# Altium PCB nrf52840_bma250e.PcbDoc
Units mil, origin at the board's own origin, x right, y up, seen from the top; angles counter-clockwise.
Board outline 1377.95 x 2936.39 mil, 2 copper layers (Top Layer, Bottom Layer), stack 12.8 mil thick; 55 components, 72 nets, 214 pads, 168 vias.
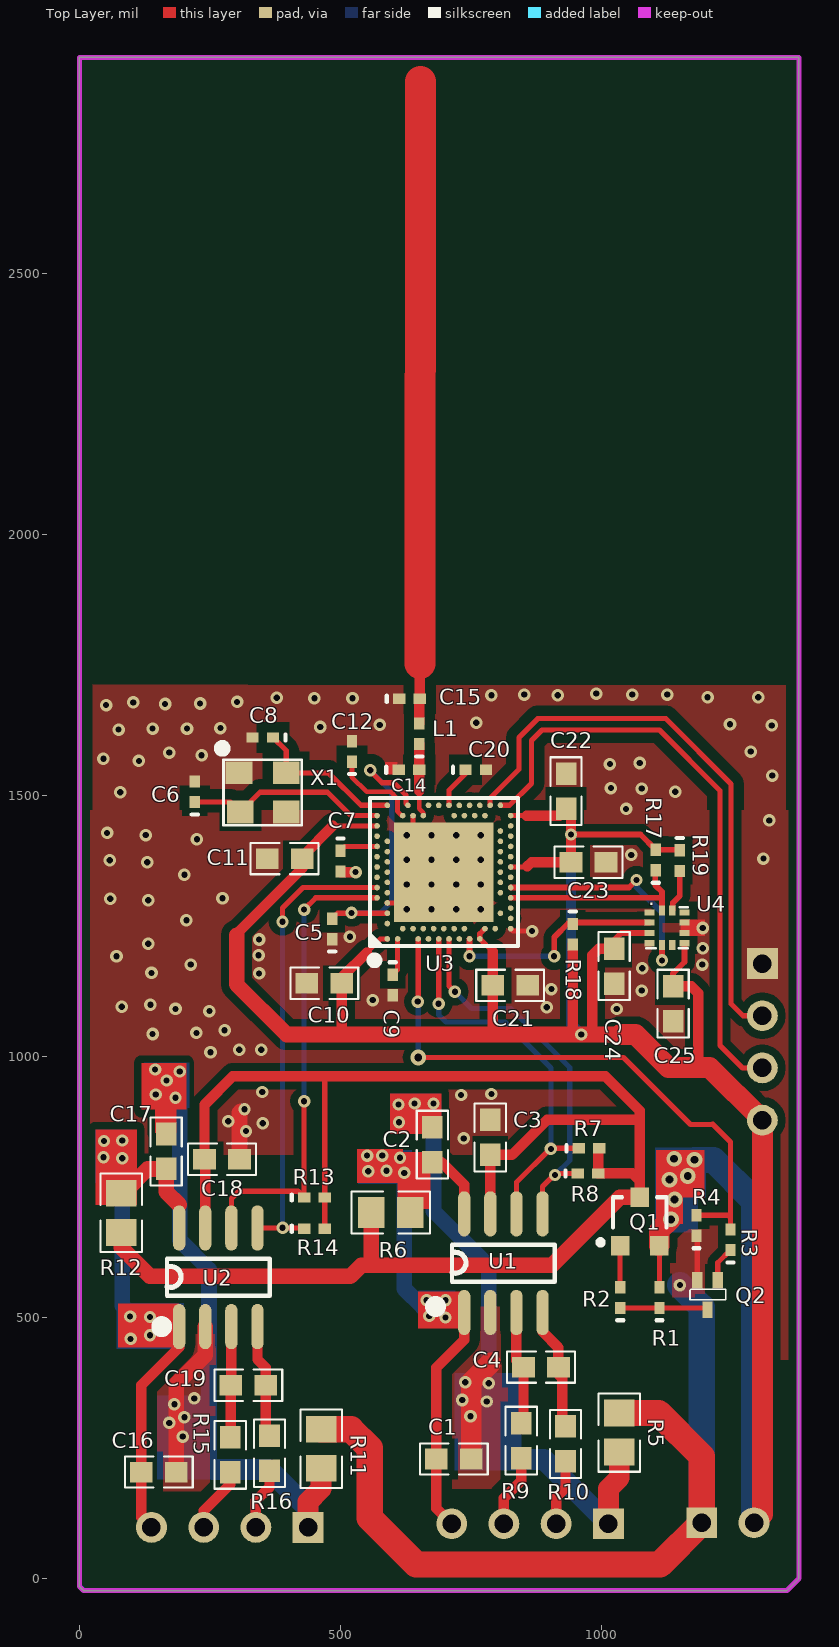
[diagram p0: Top Layer view]
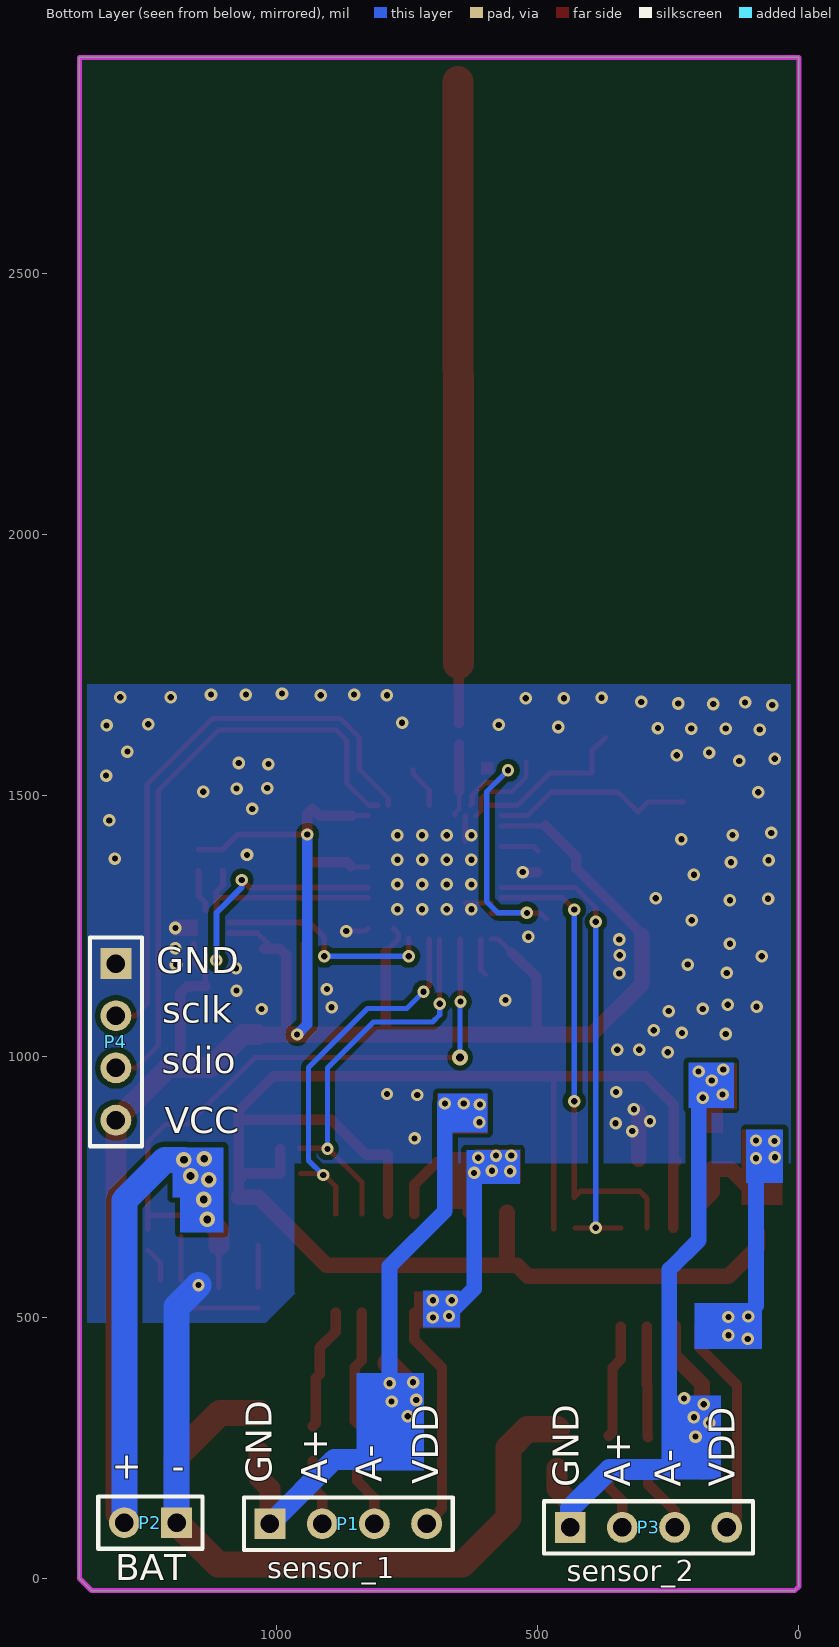
[diagram p1: Bottom Layer view, seen from below]

## Layer stack, top to bottom
Top Layer: signal copper 1.4
Dielectric: core 10, FR-4, Dk 4.2
Bottom Layer: signal copper 1.4

## Board outline
0,-15 8,-23 1354.95,-23 1377.95,0 1377.95,2913.39 0,2913.39

## Design rules (kind name [scope] priority, off if disabled: settings)
Clearance [All] p1: gap=7
ComponentClearance [All] p1 off: gap=10 collisioncheckmode=3 verticalgap=10 showdistances=FALSE
Height [All] p1 off: minheight=0 maxheight=1000 prefheight=500
MinimumSolderMaskSliver [All] p1 off: minsoldermaskwidth=10
NetAntennae [All] p1 off: netantennaetolerance=0
PolygonConnect [All] p1: connectstyle=Direct reliefconductorwidth=10 reliefentries=4 polygonreliefangle="90 Angle"
RoutingVias [All] p1: holewidth=28 width=50 viastyle="Through Hole" minholewidth=28 minwidth=50 maxholewidth=28 maxwidth=50
SilkToSilkClearance [All] p1 off: silktosilkclearance=10
SilkscreenOverComponentPads SilkToSolderMaskClearance [IsPad] p1 off: minsilkscreentomaskgap=10
SolderMaskExpansion [All] p1: expansion=4
Width [All] p1: maxlimit=100 minlimit=1 preferedwidth=10 minimp=50.000000 maximp=50.000000 favimp=50.000000
22 further rules are at their usual default settings.

## Components (designator, comment, footprint, x,y, rotation, side; value= is the part's Value field where it differs from the comment)
C1 "0.1u" 0603-1 717,229 r0 top
C2 "0.1u" 0603-1 676,831 r90 top
C3 "0.1u" 0603-1 787,845 r90 top
C4 "0.1u" 0603-1 884,405 r0 top
C5 "1.0μF" 0402-A 484,1244 r90 top
C6 "12pF" 0402-A 221,1507 r90 top
C7 "N.C." 0402-A 500,1374 r270 top
C8 "12pF" 0402-A 351,1611 r180 top
C9 "100nF" 0402-A 600,1137 r270 top
C10 "1.0μF" 0603-1 469,1140 r180 top
C11 "100nF" 0603-1 393,1379 r180 top
C12 "100pF" 0402-A 522,1584 r90 top
C14 "0.8pF" 0402-A 631,1549 r0 top
C15 "0.5pF" 0402-A 632,1685 r0 top
C16 "0.1u" 0603-1 152,204 r0 top
C17 "0.1u" 0603-1 166,818 r90 top
C18 "0.1u" 0603-1 273,803 r0 top
C19 "0.1u" 0603-1 323.46,370 r0 top
C20 "820pF" 0402-A 759,1549 r0 top
C21 "4.7μF" 0603-1 825,1136 r0 top
C22 "100nF" 0603-1 932,1508 r90 top
C23 "100nF" 0603-1 975,1372 r0 top
C24 "0.1uF" 0603-1 1024,1173 r270 top
C25 "1uF" 0603-1 1137,1101 r90 top
L1 "4.7nH" 0402-A 651,1618 r90 top
P1 "Header 4" HDR1X4 1013,105 r180 bottom
P2 "Header 2" HDR1X2 1192,107 r0 bottom
P3 "Header 4" HDR1X4 438,98 r180 bottom
P4 "Header 4" HDR1X4 1308,1178 r270 bottom
Q1 "VIC1121" SOT-23 1073,684 r0 top
Q2 "LMBT3904" SOT523 1203,519 r180 top
R1 "1M" 0402-A 1111,538 r90 top
R2 "1K" 0402-A 1036,538 r90 top
R3 "100K" 0402-A 1247,649 r90 top
R4 "1M" 0402-A 1182,676 r90 top
R5 "0R" 0805-1 1034,317 r270 top
R6 "0R" 0805-1 559,701 r0 top
R7 "10k" 0402-A 976,824 r0 top
R8 "10k" 0402-A 974,776 r0 top
R9 "1k" 0603-1 846,264 r270 top
R10 "1k" 0603-1 931,258 r270 top
R11 "0R" 0805-1 463,286 r270 top
R12 "0R" 0805-1 80,663 r90 top
R13 "10k" 0402-A 450,730 r0 top
R14 "10k" 0402-A 450,670 r0 top
R15 "1k" 0603-1 289,237 r270 top
R16 "1k" 0603-1 364,240 r270 top
R17 "10K" 0402-A 1104,1376 r90 top
R18 "10K" 0402-A 945,1234 r270 top
R19 "10K" 0402-A 1150,1375 r270 top
U1 "TM7711" SO8_n 812,604 r90 top
U2 "TM7711" SO8_N 266,577 r90 top
U3 "nRF52840-QIAA" AQFN50P700X700X85_HS-74N 698,1353 r90 top
U4 "bma250e" bma250e 1092,1276 r0 top
X1 "32MHz" SMD3225 396,1543 r180 top

## Footprints (in the part's own frame and the unit in brackets; to place one, negate y for a bottom-side part, rotate by r counter-clockwise, add the part's x,y. Pads: shape width x height; smd on the part's side, far side on the other; paste and mask are expansions set on the pad)
0402-A [mm] "Chip Inductor; Body 1 x 0.5 mm (LxW typ"
  rect 0.6x0.5 smd: 1(-0.5,0) 2(0.5,0)
  silkscreen extent -1.1,-0.15 -1.1,0.15
0603-1 [mm] "贴?"
  rect 1.1x1 smd: 1(-0.85,0) 2(0.85,0)
  silkscreen extent -1.65,-0.76 1.65,0.76, body extent -1.14,-0.38 1.14,0.38, height 1
0805-1 [mm]
  rect 1.3x1.5 smd: 1(0,0) 2(1.9,0)
  silkscreen extent -0.96,-1.02 2.85,1.02
AQFN50P700X700X85_HS-74N [mm]
  rect 4.85x4.85 smd mask+0.05: 74(0,0)
  round 0.275 smd paste+0.012 mask+0.05: A8(-1.25,3.25) A10(-0.75,3.25) A12(-0.25,3.25) A14(0.25,3.25) A16(0.75,3.25) A18(1.25,3.25) A20(1.75,3.25) A22(2.25,3.25) A23(2.75,3.25) AA24(3.25,-2.25) AB2(-2.75,-2.5) AC5(-2,-2.75) AC9(-1,-2.75) AC11(-0.5,-2.75) AC13(0,-2.75) AC15(0.5,-2.75) AC17(1,-2.75) AC19(1.5,-2.75) AC21(2,-2.75) AC24(3.25,-2.75) AD2(-2.75,-3.25) AD4(-2.25,-3.25) AD6(-1.75,-3.25) AD8(-1.25,-3.25) AD10(-0.75,-3.25) AD12(-0.25,-3.25) AD14(0.25,-3.25) AD16(0.75,-3.25) AD18(1.25,-3.25) AD20(1.75,-3.25) AD22(2.25,-3.25) AD23(2.75,-3.25) B1(-3.25,2.75) B3(-2.5,2.75) B5(-2,2.75) B7(-1.5,2.75) B9(-1,2.75) B11(-0.5,2.75) B13(0,2.75) B15(0.5,2.75) B17(1,2.75) B19(1.5,2.75) B24(3.25,2.75) C1(-3.25,2.25) D2(-2.75,2) D23(2.75,2) E24(3.25,1.75) F2(-2.75,1.5) F23(2.75,1.5) G1(-3.25,1.25) H2(-2.75,1) H23(2.75,1) J1(-3.25,0.75) J24(3.25,0.75) K2(-2.75,0.5) L1(-3.25,0.25) L24(3.25,0.25) M2(-2.75,0) N1(-3.25,-0.25) N24(3.25,-0.25) P2(-2.75,-0.5) P23(2.75,-0.5) R1(-3.25,-0.75) R24(3.25,-0.75) T2(-2.75,-1) T23(2.75,-1) U1(-3.25,-1.25) U24(3.25,-1.25) V23(2.75,-1.5) W1(-3.25,-1.75) W24(3.25,-1.75) Y2(-2.75,-2) Y23(2.75,-2)
  silkscreen extent -4.42,-3.6 3.6,3.6, body extent -3.55,-3.55 3.55,3.55, height 0.85
bma250e [mm]
  rect 0.5x0.3 smd: 1(0,0) 2(0,-0.5) 3(0,-1) 4(0,-1.5) 7(1.7,-1.5) 8(1.7,-1) 9(1.7,-0.5) 10(1.7,0)
  rect 0.3x0.5 smd: 5(0.6,-1.59) 6(1.1,-1.59) 11(1.1,0.09) 12(0.6,0.09)
  silkscreen extent -0.15,-1.75 1.85,0.25
HDR1X2 [mm] "Connector; Header; 2 Position"
  rect 1.5x1.5 hole 0.9: 1(0,0)
  round 1.5 hole 0.9: 2(2.54,0)
  silkscreen extent -1.27,-1.27 3.81,1.27
HDR1X4 [mm] "Connector; Header; 4 Position"
  rect 1.5x1.5 hole 0.9: 1(0,0)
  round 1.5 hole 0.9: 2(2.54,0) 3(5.08,0) 4(7.62,0)
  silkscreen extent -1.27,-1.27 8.89,1.27
SMD3225 [mm]
  rect 1.3x1.1 smd: 1(0,0) 2(2.3,0) 3(2.23,1.9) 4(0,1.9)
  silkscreen extent -0.76,-1.32 3.24,2.54
SO8_n [mm] "SOIC, 8-Leads, Body 4.9x3.9mm, Pitch 1.27mm, IPC Medium Density"
  oval 2.2x0.6 smd: 1(-2.4,1.905) 2(-2.4,0.635) 3(-2.4,-0.635) 4(-2.4,-1.905) 5(2.4,-1.905) 6(2.4,-0.635) 7(2.4,0.635) 8(2.4,1.905)
  silkscreen extent -2.23,-2.5 0.9,3.42, body extent -2,-2.5 2,2.5, height 1.75
SO8_N [mm] "SOIC, 8-Leads, Body 4.9x3.9mm, Pitch 1.27mm, IPC Medium Density"
  oval 2.2x0.6 smd: 1(-2.4,1.905) 2(-2.4,0.635) 3(-2.4,-0.635) 4(-2.4,-1.905) 5(2.4,-1.905) 6(2.4,-0.635) 7(2.4,0.635) 8(2.4,1.905)
  silkscreen extent -2.52,-2.5 0.9,2.88, body extent -2,-2.5 2,2.5, height 1.75
SOT523 [mm]
  rect 0.5x0.8 smd: 1(-0.5,-1.34) 2(0.5,-1.34) 3(0,0.1)
  silkscreen extent -0.89,-0.89 0.85,-0.38
SOT-23 [mm]
  rect 0.9x0.95 smd: 1(-0.95,-1.175) 2(0.95,-1.175) 3(0,1.175)
  silkscreen extent -2.03,-1.14 1.3,1.18

## Part data
C1 C2 C3 C4 C7 C16 C17 C18 C19: library part C0402-N.C., "Not mounted"
C5 C10: library part C0603-1?, "Capacitor, X7R, ±10%"
C6 C8: library part C0402-12p, "Capacitor, NP0, ±2%"
C9 C11 C22 C23: library part C0402-100n, "Capacitor, X7R, ±10%"
C12: library part C0402-100p, "Capacitor, NP0, ±5%"
C14: library part C0402-0.8p, "Capacitor, NP0, ±10%"
C15 C24 C25: library part C0402-0.5p, "Capacitor, NP0, ±10%"
C20: library part C0402-820p, "Capacitor, NP0, ±5%"
C21: library part C0603-4μ7-6.3V-, "Capacitor, X7R, ±10"
L1: library part L0402-4n7, "High frequency chip inductor ±5%"
P1 P3 P4: "Header, 4-Pin"
P2: "Header, 2-Pin"
Q1: library part MOSFET-P, "P-Channel MOSFET"
Q2: library part 2N3904, "NPN General Purpose Amplifier"
R1 R2 R3 R4 R5 R6 R7 R8 R9 R10 R11 R12 R13 R14 R15 R16: library part R-10K, "resistor"
R17 R18 R19: library part Res1, "Resistor"
U3: library part nRF52840-QIAAD0, "Multi-protocol Bluetooth Low Energy, IEEE 802.15.4, ANT and 2.4GHz proprietary system-on-chip"
X1: library part XTAL_SMD2016_32MHz_8pF_General, "XTAL SMD 2016, 32MHz, Cl=8pF, Total Tol: ±40ppm"

## Via types
v1: diameter 24, hole 12, Top Layer to Bottom Layer, 104 vias
v2: diameter 23.62, hole 11.81, Top Layer to Bottom Layer, 57 vias
v3: diameter 30, hole 15, Top Layer to Bottom Layer, 7 vias

## Nets (pads, with @x,y where several pads share a name; then routed paths per layer and width w, separated by ;. In a path a pad name is that pad's centre, name@x,y a point inside that pad or via, vN(x,y) a via of type N, cw(c..) or ccw(c..) an arc to the next point about the centre after c; other vN are vias at no path point)
DEC1: C9.1 U3.C1 | length 72.3
  Top Layer w10: C9.1 609.42,1166.1 U3.C1
DEC3: C12.1 U3.D23 | length 171.2
  Top Layer w9: C12.1 522,1535 550,1507 596,1507 609,1494 609,1470 617.73,1461.27 U3.D23
DEC4_6: C5.2 U3.B5 U3.E24 | length 574.2
  Top Layer w10: C5.2 494.57,1274.26 U3.B5 ; v2(557,1548) 557,1547 580,1524 602.33,1524 625.5,1500.83 625.5,1484.56 U3.E24
  Bottom Layer w10: v2(521,1275) 576,1275 598,1297 598,1507 v2(557,1548)
GND: C3.2 C5.1 C6.2 C7.2 C8.2 C9.2 C10.2 C11.2 C12.2 C14.1 C15.1 C18.2 C20.2 C21.2 C22.2 C23.2 C24.2 C25.1 P2.1 P4.1 Q2.2 R4.1 R5.1 R11.1 U3.74 U3.AD2 U3.B7 U3.F23 U4.1 U4.4 U4.8 U4.9 X1.2 X1.4 | length 2104.8
  Top Layer w10: U3.B7 U3.74@638.94,1293.94 ; U3.74@638.94,1412.06 U3.F23 ; U3.AD2 830.69,1240 v2(867,1240) ; U4.8 U4.9 ; Q2.2 R4.1@1183.31,655
  Top Layer w20: C7.2@501.31,1353 v2(529,1353)
  Top Layer w30: C18.2 306.46,892.46 v2@309,895
  Top Layer w50: R11.1 520,286 556,250 556,116 645,27 1112,27 P2.1 1192,234 1109,317 R5.1
  Bottom Layer w50: v2(1150,562) 1192,520 P2.1
  other v1: 251,1008 306,1013 348,1013 140,1043 224,1045 278,1050 249,1087 184,1091 895,1094 81,1095 136,1099 562,1108 904,1129 344,1159 138,1160 213,1176 1193,1176 1193,1176 71,1192 343,1194 1194,1207 132,1216 344,1224 518,1229 1194,1246 205,1261 627.13,1282.13 674.38,1282.13 721.62,1282.13 768.87,1282.13 132,1299 59,1302 274,1303 627.13,1329.38 674.38,1329.38 721.62,1329.38 768.87,1329.38 201,1348 130,1372 58,1376 627.13,1376.62 674.38,1376.62 721.62,1376.62 768.87,1376.62 1310,1379 1057,1386 225,1416 127,1424 627.13,1423.87 674.38,1423.87 721.62,1423.87 768.87,1423.87 53,1428 1321,1452 1047,1474 78,1506 1141,1507 1077,1513 1018,1514 1327,1538 1016,1560 1073,1562 114,1566 46,1570 234,1577 172,1582 1286,1584 75,1626 140,1628 206,1628 270,1629 461,1631 1326,1634 575,1635 1246,1636 760,1639 51,1673 164,1675 231,1676 103,1678 302,1679 450,1686 523,1686 378,1687 1203,1688 1300,1688 789,1692 916,1692 852,1693 1059,1693 1126,1693 990,1695
  other v2: 736,843 319,857 351,872 285,876 316,899 731,926 789,928 350,932 1029,1091 1077,1126 1078,1169
NetC4_1: C4.1 R9.1 U1.3 | length 219.5
  Top Layer w20: U1.3 837,418.54 C4.1 850.54,302 R9.1
NetC4_2: C4.2 R10.1 U1.4 | length 236.3
  Top Layer w20: U1.4 887,473 917.46,442.54 C4.2 917.46,391.54 925,384 925,297.46 R10.1
NetC7_1: C7.1 U3.A18 | length 73.6
  Top Layer w10: C7.1 508.53,1402.21 U3.A18
NetC14_2: C14.2 L1.1 U3.H23 | length 142.4
  Top Layer w9: 650.69,1508.69 650.69,1474.82 658.63,1466.88 U3.H23
  Top Layer w10: C14.2@649,1547.31 C14.2
  Top Layer w20: 650.69,1508.69 C14.2 ; C14.2@651,1549.31 L1.1
NetC19_1: C19.1 R15.1 U2.3 | length 212.9
  Top Layer w20: R15.1 290,271.46 C19.1 291,371 U2.3
NetC19_2: C19.2 R16.1 U2.4 | length 218.6
  Top Layer w20: U2.4 341,420 356.93,404.07 C19.2 356.93,280.54 R16.1
NetC20_1: C20.1 U3.N24 | length 81.1
  Top Layer w10: U3.N24 707.84,1509.84 739.32,1541.31 C20.1
NetQ1_1: Q1.1 R2.2 | length 79.7
  Top Layer w10: R2.2@1035.6,558.09 Q1.1
NetQ2_1: Q2.1 R3.1 | length 67.6
  Top Layer w10: Q2.1 1222.68,605 R3.1
NetQ2_3: Q2.3 R1.1 R2.1 | length 168.3
  Top Layer w10: R2.1 R1.1 1199.75,518.31 Q2.3
NetR19_2: R19.2 U4.11 | length 81.9
  Top Layer w11: U4.11 1136.59,1280.82 1136.59,1294.41 1150,1307.82 R19.2
P0.04/AIN2: U3.J1
P0.05/AIN3: U3.K2
P0.06: R7.1 U1.6 U3.L1 | length 763.9
  Top Layer w10: v2@688.16,1101.16 U3.L1 ; U1.6 837,759 902,824 R7.1
  Bottom Layer w10: v2(688,1101) 688,1080 702,1066 815,1066 903,978 v2(903,823)
P0.07: U3.M2
P0.08: R8.1 U1.5 U3.N1 | length 733.5
  Top Layer w10: U3.N1 707.84,1135.16 v2(719,1124) ; U1.5 887,751 912,776 R8.1
  Bottom Layer w10: v2(719,1124) 751,1092 826,1092 939,979 939,801 v2(911,773)
P0.09/NFC1: U3.L24
P0.10/NFC2: U3.J24
P0.11: U3.T2
P0.12: R18.1 U3.U1 U4.2 | length 426.1
  Top Layer w11: v2(747.21,1191.79) U3.U1 ; v2(909.21,1191.79) 909.21,1228.21 936.68,1255.69 R18.1@953,1255.69 ; R18.1@953,1255.63 953.69,1256.31 U4.2
  Bottom Layer w11: v2(747.21,1191.79) v2(909.21,1191.79)
P0.13: R17.1 U3.AD8 U4.12 | length 371.9
  Top Layer w11: U3.AD8 1115.41,1303.79 ; R17.1 1103,1355.31 1103,1328 1115.62,1315.38 U4.12
P0.14: U3.AC9
P0.15: U3.AD10 U4.5 | length 450.6
  Top Layer w11: U3.AD10 1052.47,1323.47 v2(1067,1338) ; v2(1115.62,1184) U4.5
  Bottom Layer w11: v2(1067,1338) 1067,1324 1115.62,1275.38 v2(1115.62,1184)
P0.16: U3.AC11
P0.17: U3.AD12
P0.18/RESET: U3.AC13
P0.19: U3.AC15
P0.20: U3.AD16
P0.21: U3.AC17
P0.22: U3.AD18
P0.23: U3.AC19
P0.24: U3.AD20
P0.25: U3.AC21
P0.26: R3.2 R4.2 U3.G1 | length 1126.7
  Top Layer w10: v2@648.79,1105.79 U3.G1 ; v3(649,998) 1042,998 1170.5,869.5 1213.5,869.5 ; R4.2 1242.31,695.69 1247,691 ; 1213,870 1213.5,869.5 ; R3.2 1247,691 ; 1213.5,869.5 1247,836 1247,691
  Bottom Layer w10: v2(648,1105) 649,1104 v3(649,998)
P0.27: U3.H2
P1.00: U3.AD22
P1.01: U3.Y23
P1.02: U3.W24
P1.03: U3.V23
P1.04: U3.U24
P1.05: U3.T23
P1.06: U3.R24
P1.07: U3.P23
P1.08: U3.P2
P1.09: U3.R1
P1.10: U3.A20
P1.11: U3.B19
P1.12: U3.B17
P1.13: U3.A16
P1.14: U3.B15
P1.15: U3.A14
RF: C15.2 L1.2 | length 1228.3
  Top Layer w20: L1.2 C15.2@651,1684.31 ; C15.2 651.69,1751.69
  Top Layer w59.06: 652,1752 653,2867
SWDCLK: P4.2 U3.AA24 | length 1116.2
  Top Layer w10: U3.AA24 786.58,1494.58 842,1550 842,1611 878,1647 1123,1647 1248,1522 1248,1101 1271,1078 P4.2
SWDIO: P4.3 U3.AC24 | length 1163.3
  Top Layer w10: U3.AC24 823.95,1480.95 866,1523 866,1605 886,1625 1111,1625 1227,1509 1227,1021 1270,978 P4.3
TM7711_1_A+: P1.2 R10.2 | length 127
  Top Layer w20: P1.2 913,156 931,174 R10.2
TM7711_1_A-: P1.3 R9.2 | length 139.2
  Top Layer w20: P1.3 813,154 846,187 R9.2
TM7711_1_AGND: C1.2 C2.2 P1.1 R5.2 U1.2 | length 1166.9
  Top Layer w40: C1.2 750.46,376.46 787,413 ; P1.1 1013,172 1034,193 R5.2
  Bottom Layer w30: v2(678,910) 678,704 784,598 v1(784,374)
  Bottom Layer w40: 822,228 890,228 P1.1
  other v1: 749,311 733,342 739,376
  other v2: 780,339 612,874 611,908 642,910
TM7711_1_AVDD: C1.1 C2.1 P1.4 R6.2 U1.1 U1.8 | length 976.9
  Top Layer w20: R6.2 633.8,755.34 C2.1 693.46,797.54 737,754 U1.8 ; P1.4 683.54,134.46 C1.1 683.54,403.54 737,457 U1.1
  Bottom Layer w30: v2(622,777) 622,555 657,520 675,520
  other v2: 701,500 670,503 665,533 701,533 553,780 588,781 614,806 551,810 580,810
TM7711_2_A+: P3.2 R16.2 | length 119.3
  Top Layer w20: P3.2 338,149 364,175 R16.2
TM7711_2_A-: P3.3 R15.2 | length 126.7
  Top Layer w20: P3.3 238,130 289,181 R15.2
TM7711_2_AGND: C16.2 C17.2 P3.1 R11.2 U2.2 | length 1303.3
  Top Layer w30: C16.2 185.46,298 185.46,372.46 241,428 U2.2
  Top Layer w40: P3.1 438,147 463,172 R11.2
  Bottom Layer w30: 192,932 192,648 248,592 248,326
  Bottom Layer w40: 256,209 363,209 438,134 P3.1
  other v1: 198,272 172,298 201,309 182,334 220,345
  other v2: 184,921 146,927 167,954 167,954 192,971 145,975
TM7711_2_AVDD: C16.1 C17.1 P3.4 R12.2 U2.1 U2.8 | length 1012.3
  Top Layer w20: P3.4 118.54,117.46 C16.1 118.54,370.54 191,443 U2.1 ; U2.8 191,716
  Top Layer w30: R12.2 83.8,737.8 130.54,784.54 C17.1 166,741 191,716
  Bottom Layer w30: v2(82,805) 82,523 135,470 v2(135,466)
  other v2: 98,459 135,501 97,502 46,807 47,838 82,839
TM7711_2_DOUT: R13.1 U2.6 U3.A8 | length 907
  Top Layer w10: U2.6 291,728 305,742 418.32,742 R13.1 v1(430.32,914.31) ; v1(430.32,1281.31) 452.79,1303.79 U3.A8
  Bottom Layer w10: v1(430.32,914.31) v1(430.32,1281.31)
TM7711_2_SCK: R14.1 U2.5 U3.A10 | length 1029.4
  Top Layer w10: U2.5 R14.1@428.83,671.49 ; v2(389,1258) 389,1284 428.47,1323.47 ; 560.55,1323.79 428.79,1323.79 428.47,1323.47 ; U3.A10 428.47,1323.47
  Bottom Layer w10: v1(389,672) v2(389,1258)
VCC_TM7711: C3.1 C18.1 Q1.3 R6.1 R7.2 R8.2 R12.1 R13.2 R14.2 U1.7 U2.7 | length 3340.6
  Top Layer w10: R14.2 R13.2 469.69,962
  Top Layer w20: C18.1@234,799 241,792 U2.7 ; C18.1 239.54,907.54 294,962 469.69,962 1007,962 1073,896 1073,762 ; U1.7 C3.1 ; C3.1@787,812.54 C3.1 ; R7.2@993.69,822 R8.2 1059,776 1073,762 ; 1071,879 896,879 828.54,811.54 C3.1 ; Q1.3 1073,762
  Top Layer w30: R12.1 80,634 135,579 519,579 540,600 905,600 1035.26,730.26 Q1.3 ; 559,601 R6.1
VDD_NRF: C10.1 C11.1 C21.1 C22.1 C23.1 C24.1 C25.2 P2.2 P4.4 Q1.2 R1.2 R17.2 R18.2 R19.1 U3.A22 U3.AD14 U3.AD23 U3.B1 U3.W1 U3.Y2 U4.3 U4.7 | length 5389.8
  Top Layer w10: 485.58,1441.58 U3.A22 ; 550,1199 576.05,1225.05 U3.B1 ; U3.Y2 766.9,1234.89 U3.W1 791.54,1200.41 ; U3.AD14 856.84,1362.84 858,1364 ; U3.AD23 856.27,1461.27 ; R1.2 Q1.2@1111,637.14
  Top Layer w11: v2(941.54,1425) 1074.69,1425 R17.2 R19.1@1149,1395.69 ; C24.1@1018,1217 1037.63,1236.63 U4.3 ; C25.2@1137,1130.46 C25.2 1137,1159 1158.93,1180.93 U4.7
  Top Layer w20: 301,1232 301,1235 426.46,1360.46 C11.1 426.46,1382.46 485.58,1441.58 ; 502.46,1042.54 C10.1 502.46,1151.46 550,1199 ; 791.54,1043.54 C21.1 791.54,1200.41 ; 856.27,1461.27 918.73,1461.27 C22.1 941.54,1465 v2(941.54,1425) C23.1 866,1372 858,1364 ; 945,1041 945,1042 R18.2 ; 982,1047 982,1194 994.46,1206.46 C24.1 ; C25.2 1171.54,1134.46 1185,1121 1185,979
  Top Layer w30: 301,1232 301,1138 397,1042 945,1042 v2(961,1042) 1036,1042
  Top Layer w40: 1036,1042 1065,1042 1128,979 1185,979 1207,979 P4.4 1308,123 P2.2 ; Q1.2 1110.4,666.24 v3@1132.16,688
  Bottom Layer w20: v2(941.54,1425) 941.54,1061.46 v2(961,1042)
  Bottom Layer w50: v3(1178,802) 1214,802 1292,724 P2.2
  other v3: 1133,688 1140,726 1130,764 1165,771 1139,804
XC1: C8.1 U3.B24 X1.1 | length 297.9
  Top Layer w10: C8.1 396,1585.69 X1.1 477,1543 539.05,1480.95 U3.B24
XC2: C6.1 U3.A23 X1.3 | length 391.2
  Top Layer w10: C6.1 289.09,1487.31 X1.3 346.01,1506 475,1506 519.73,1461.27 U3.A23
pads on no net: U3.A12 U3.AB2 U3.AC5 U3.AD4 U3.AD6 U3.B3 U3.B9 U3.B11 U3.B13 U3.D2 U3.F2 U4.6 U4.10

## Polygon pours and split planes (outlines as drawn)
TM7711_1_AGND on Top Layer "Bottom Layer-No Net 1" (solid, remove dead copper, pour order 4): 737,521 840,521 843,518 851,510 851,163 842,172 683.54,172 683.54,403.54 689,409
TM7711_2_AGND on Top Layer "Bottom Layer-No Net 1" (solid, remove dead copper, pour order 2): 136,464 140,468 295,468 295,180 284,169 282,167 136,167
GND on Top Layer "Bottom Layer-No Net 1" (solid, remove dead copper, pour order 12): 652,1711 1402,1711 1495,1618 1485,1608 1485,1456 -179,1456 -195,1440 -189,1446 -189,1713
GND on Top Layer "Bottom Layer-No Net 1" (solid, remove dead copper, pour order 14): -41,1472 1677,1472 1749,1400 1644,1295 1644,419 1188,419 1007,600 993.69,613.31 993.69,812 -162,812 -190,784
GND on Bottom Layer "Bottom Layer-No Net 1" (solid, remove dead copper, pour order 7): -3,1712 -2,1713 1427,1713 1427,525 1422,520 1392,490 1088,490 1021,490 965,546 967,548 967,795 -151,795 -179,767

## Keep-outs
Keep-Out Layer:
  lines w10: 0,-15 8,-23 1354.95,-23 1377.95,0 1377.95,2913.39 0,2913.39 0,0 0,-15

## Other copper
Top Layer:
  rectangle net TM7711_2_AVDD: 31,715 110,860
  rectangle net TM7711_2_AVDD: 74,443 191,527
  rectangle net TM7711_2_AGND: 145,853 186,975
  rectangle net TM7711_2_AGND: 119,898 205,987
  rectangle net TM7711_1_AVDD: 609,708 672,817
  rectangle net TM7711_1_AVDD: 532,758 620,823
  rectangle net TM7711_1_AVDD: 648,479 737,550
  rectangle net TM7711_1_AGND: 595,851 693,929
  rectangle net VDD_NRF: 1104,679 1156,821
  rectangle net VDD_NRF: 1116,730 1197,821
  rectangle net GND: 1151,1231 1198,1262
  rectangle net GND: 584.79,1540 609,1564.04
Bottom Layer:
  rectangle net TM7711_1_AVDD: 534,756 637,821
  rectangle net TM7711_1_AGND: 596,854 691,929
  rectangle net TM7711_1_AGND: 718,207 847,394
  rectangle net TM7711_2_AGND: 149,190 263,351
  rectangle net TM7711_2_AVDD: 30,758 101,860
  rectangle net TM7711_2_AVDD: 71,440 200,528
  rectangle net TM7711_2_AGND: 124,901 211,988
  rectangle net TM7711_1_AVDD: 649,481 720,552
  rectangle net VDD_NRF: 1102,663 1185,826
  rectangle net VDD_NRF: 1135,730 1200,819

## Silkscreen, mask and mechanical layers (free items; w line width, h text height)
Top Overlay:
  lines w10: 168,559 ccw(c174.7,577.84) 170.67,597.44 ; 713.57,586 ccw(c720.27,604.84) 716.25,624.44
Bottom Overlay:
  text "GND" at 1231,1159 h50
  text "sclk" at 1219,1065 h50
  text "sdio" at 1220,968 h50
  text "VCC" at 1215,853 h50
  text "+" at 1316,191 h50
  text "-" at 1201,190 h50
  text "A-" at 799,184 h50 r270
  text "GND" at 1010,183 h50 r270
  text "A+" at 903,182 h50 r270
  text "A+" at 903,182 h50 r270
  text "VDD" at 691,181 h50 r270
  text "VDD" at 123,176 h50 r270
  text "A-" at 226,176 h50 r270
  text "A+" at 323,176 h50 r270
  text "GND" at 422,175 h50 r270
  text "sensor_1" at 1018,1 h40
  text "BAT" at 1309,-3 h50
  text "sensor_2" at 445,-5 h40
Top Solder:
  lines w59.06: 652,1752 653,2867